# Altium PCB PCB1_avant_stackup.PcbDoc
Units mm, origin at the board's own origin, x right, y up, seen from the top; angles counter-clockwise.
Board outline 97.16 x 61.09 mm, 4 copper layers (Top Layer, GND, POWER, Bottom Layer), stack 0.603 mm thick; 63 components, 42 nets, 193 pads, 48 vias.
Unrouted connection lines stored in the file: 1.
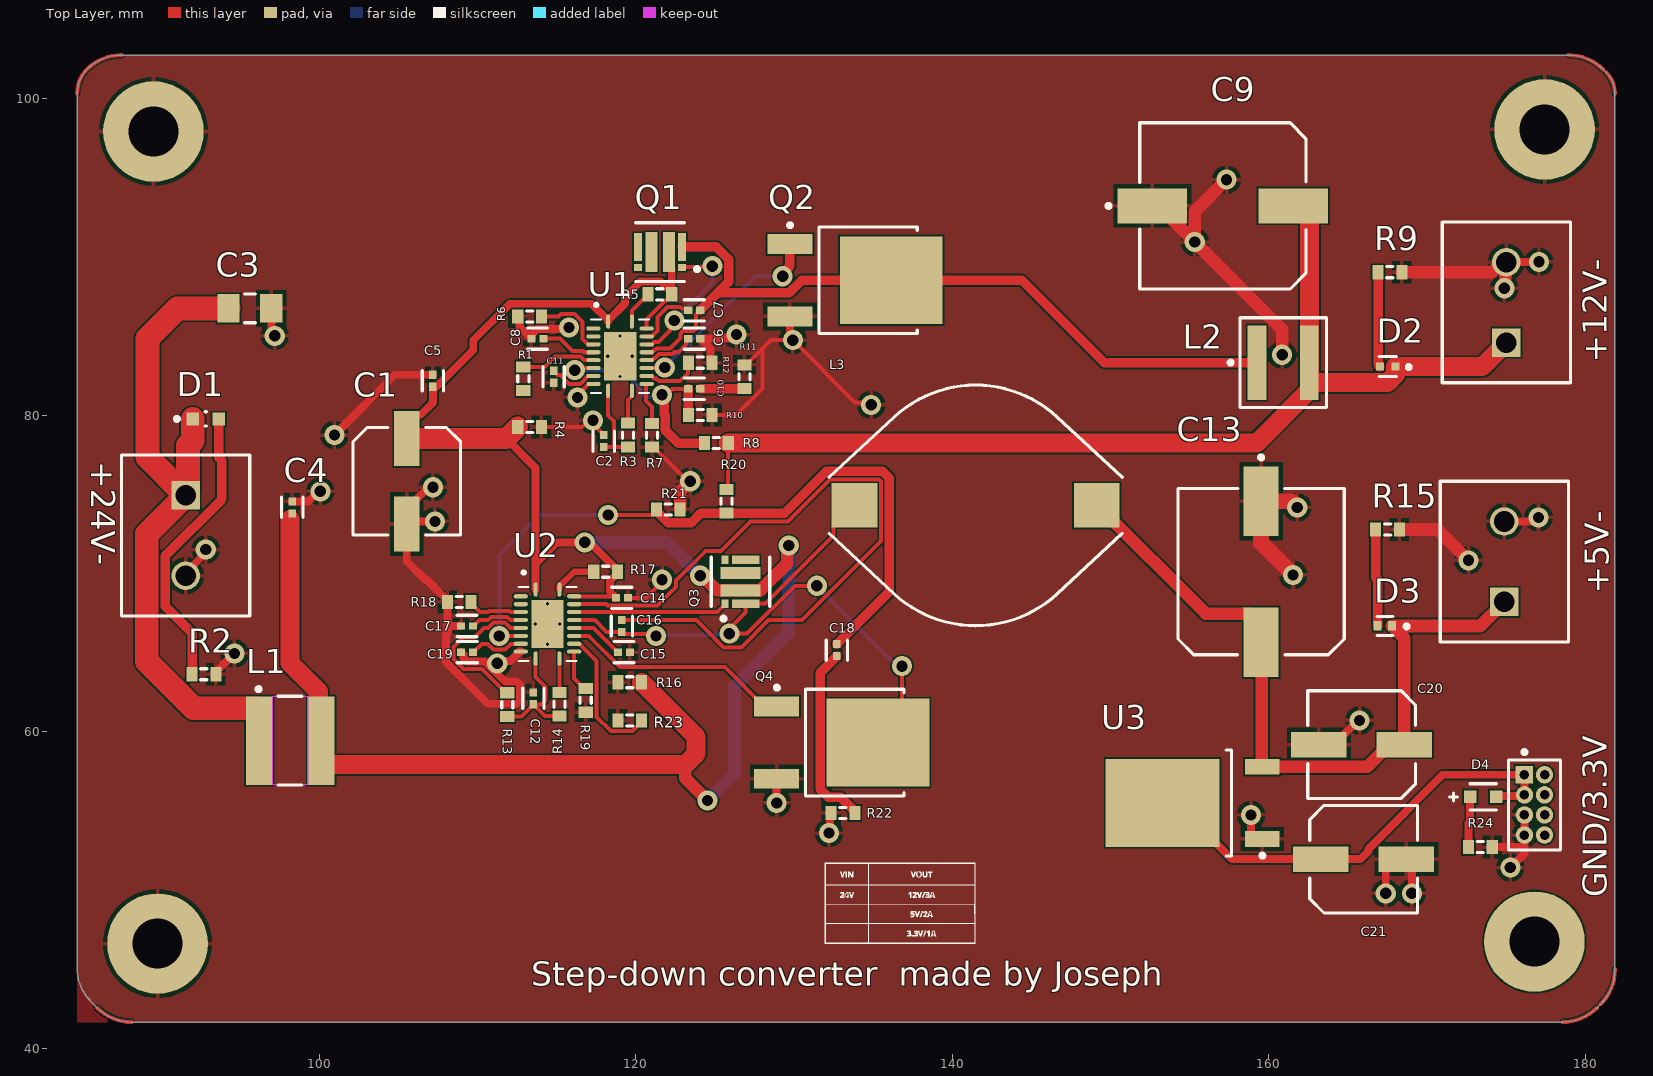
[diagram p0: Top Layer view]
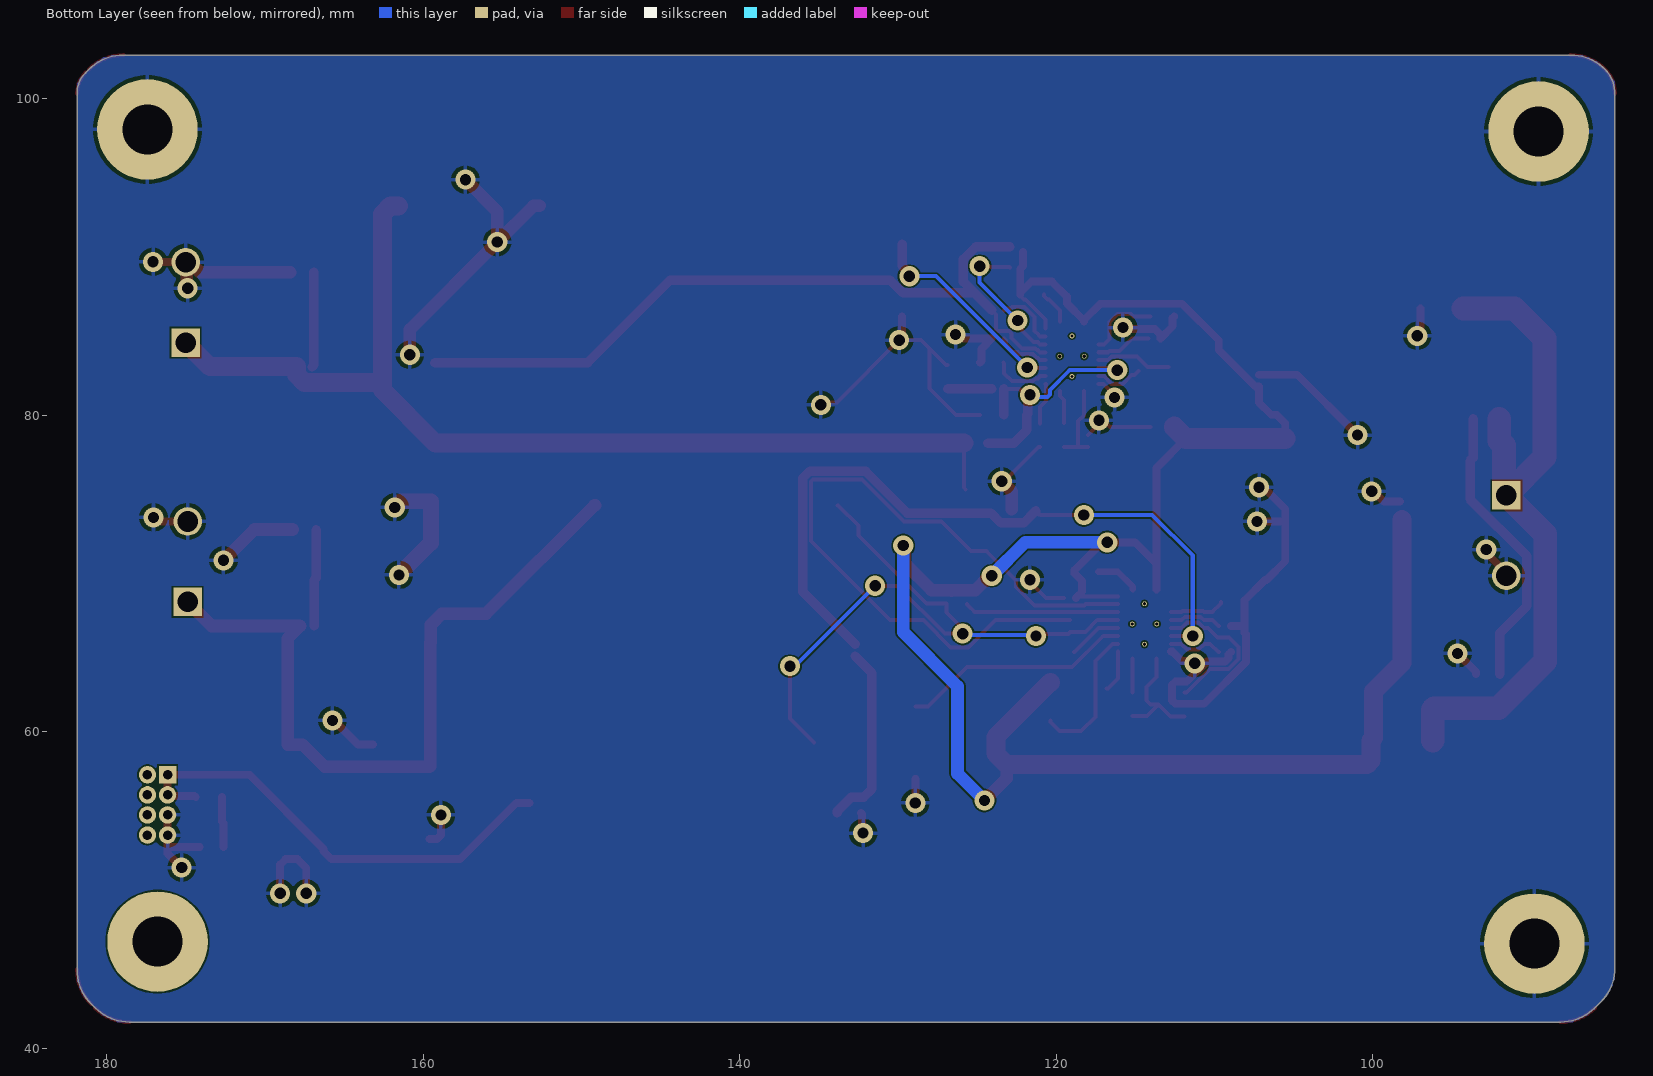
[diagram p1: Bottom Layer view, seen from below]
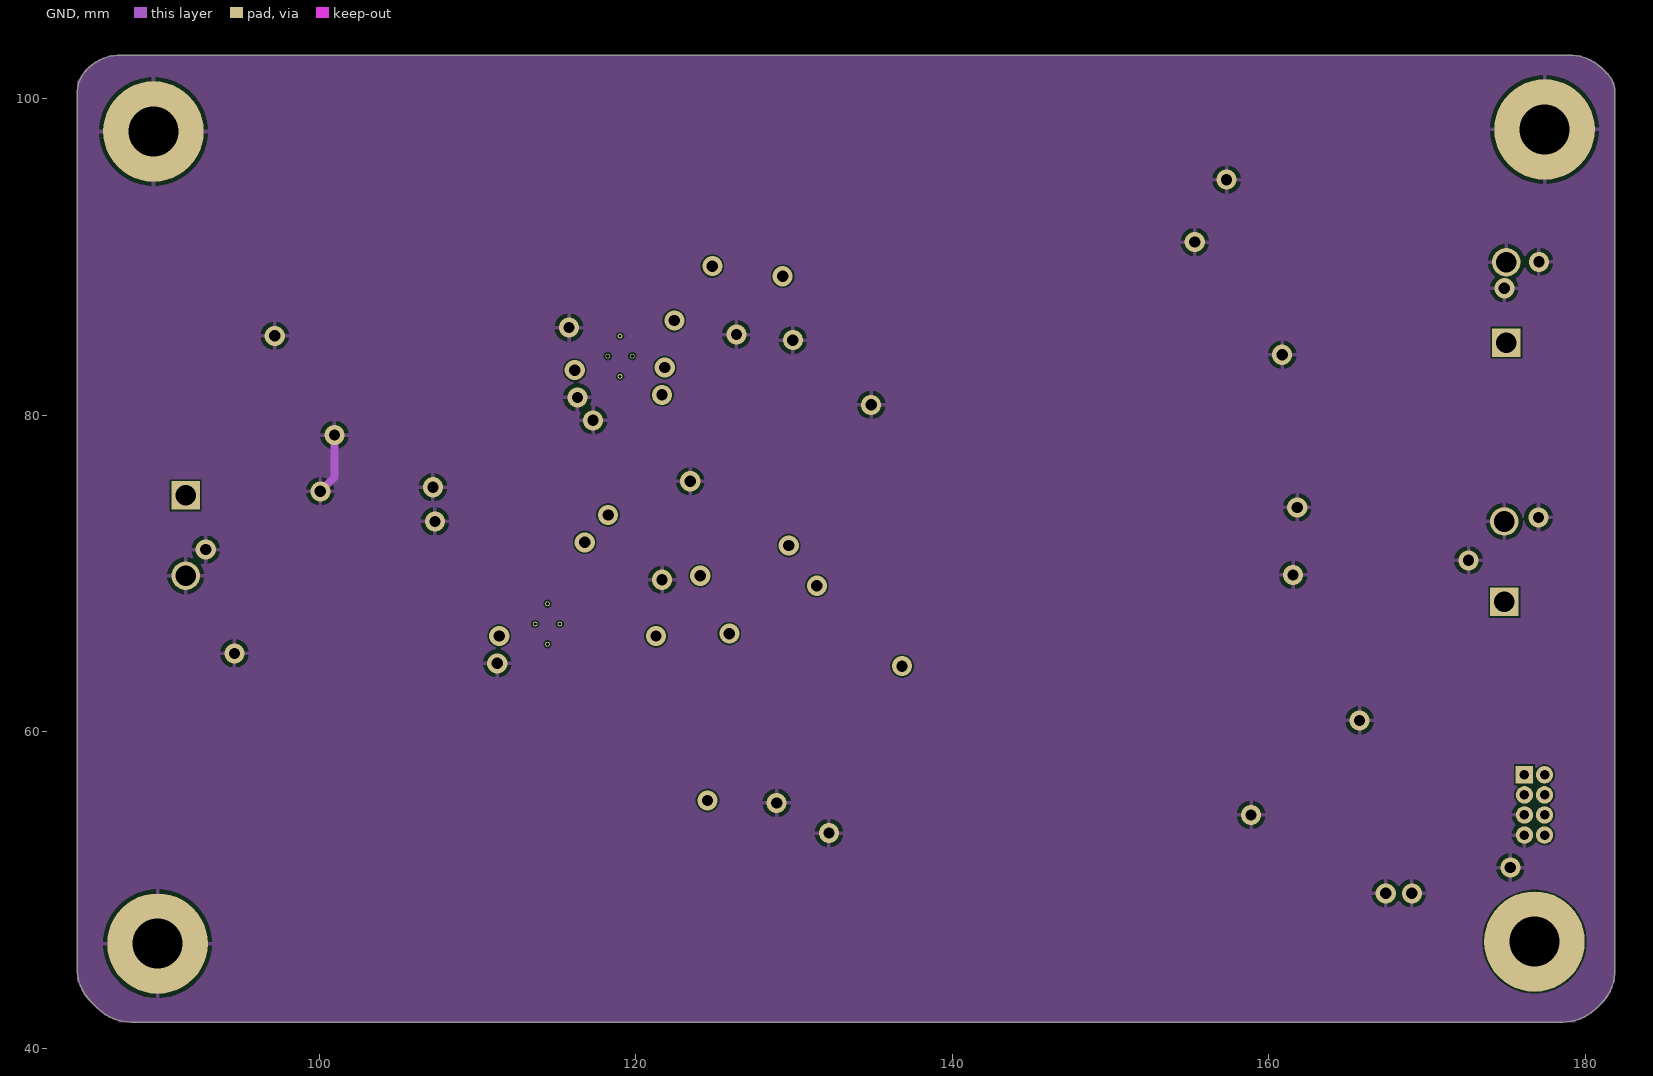
[diagram p2: GND]
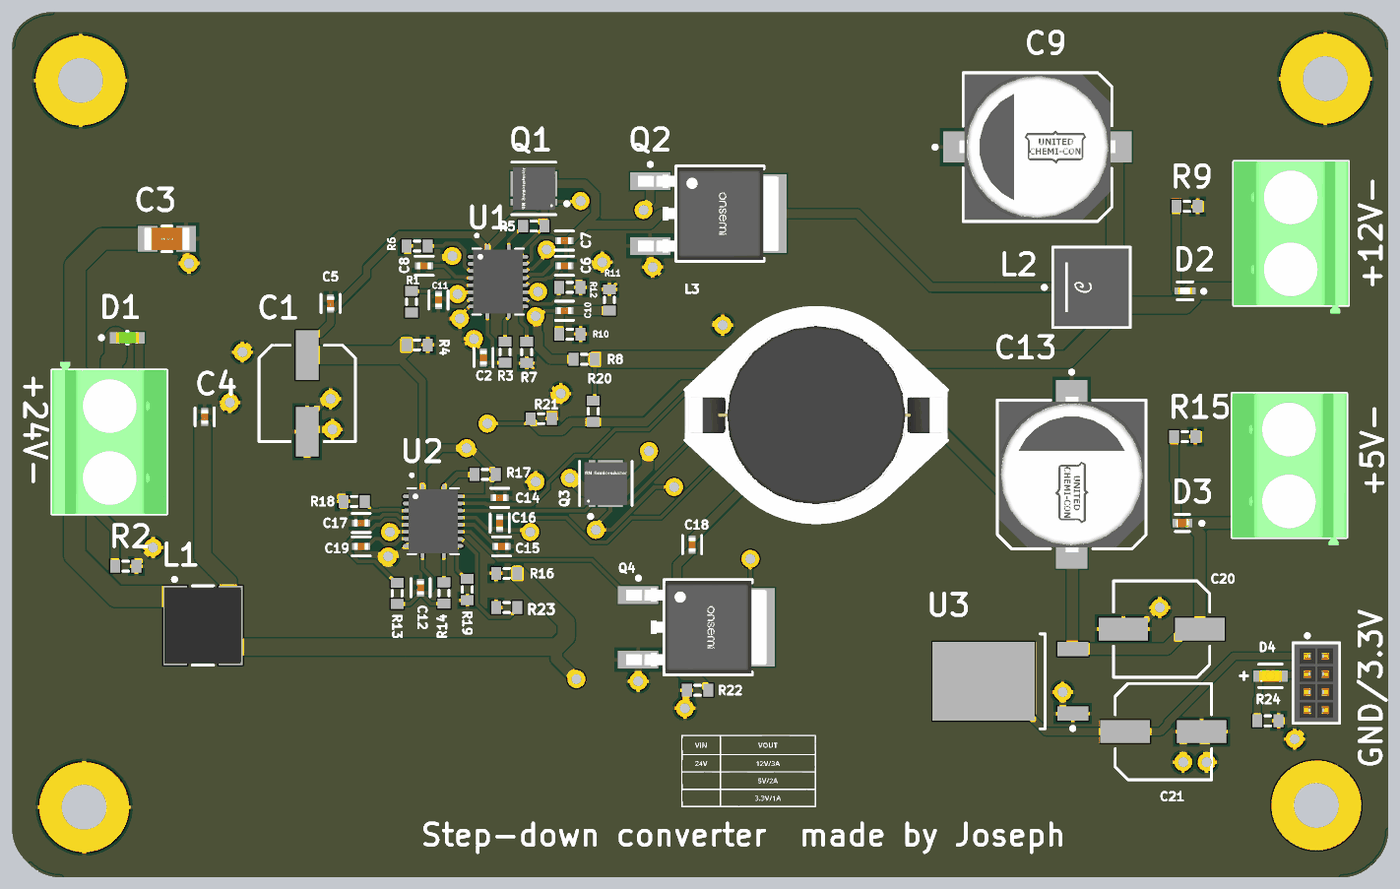
[diagram p3: 3D render of the assembled board from above, using the file's embedded part models]

## Layer stack, top to bottom
Top Solder: solder mask 0.0102, Solder Resist, Dk 3.5
Top Layer: signal copper 0.0356
Dielectric 2: prepreg 0.0711, PP-006, Dk 4.1
GND: signal copper 0.035
Dielectric 1: dielectric 0.32, FR-4, Dk 4.8
POWER: signal copper 0.035
Dielectric 3: prepreg 0.0711, PP-006, Dk 4.1
Bottom Layer: signal copper 0.0356
Bottom Solder: solder mask 0.0102, Solder Resist, Dk 3.5

## Board outline
85.607,42.917 85.97,42.554 ccw(c88.138,44.722) 88.138,41.656 178.562,41.656 ccw(c178.562,44.722) 180.73,42.554 180.966,42.79 ccw(c178.798,44.958) 181.864,44.958 181.864,100.33 ccw(c180.024,100.33) 181.325,101.631 181.111,101.845 ccw(c178.943,99.677) 178.943,102.743 87.503,102.743 ccw(c87.503,99.677) 85.335,101.845 ccw(c86.846,100.334) 84.709,100.334 84.709,45.085 ccw(c87.775,45.085)

## Design rules (kind name [scope] priority, off if disabled: settings)
Clearance [All] p1: gap=0.1 ignorepadtopadclearanceinfootprint=FALSE
PolygonConnect [All] p1: connectstyle=Relief reliefconductorwidth=0.254 reliefentries=4 polygonreliefangle="90 Angle" airgapwidth=0.254
RoutingVias [All] p1: holewidth=0.711 width=1.27 viastyle="Through Hole" minholewidth=0.711 minwidth=1.27 maxholewidth=0.711 maxwidth=1.27
SolderMaskExpansion [All] p1: expansion=0.102 istentingtop=FALSE
Width Width_4 [InNet('VIN')] p1: maxlimit=2 minlimit=0.254 preferedwidth=1.3
Width Width_3 [InNet('+24')] p2: maxlimit=2 minlimit=0.254 preferedwidth=1.3
Width Width_2 [InNet('+5')] p3: maxlimit=0.8 minlimit=0.254 preferedwidth=0.6
Width Width_1 [InNet('+12')] p4: maxlimit=1.2 minlimit=0.254 preferedwidth=1
Width [InNet('+3.3')] p5: maxlimit=0.5 minlimit=0.254 preferedwidth=0.3
30 further rules are at their usual default settings.

## Classes and differential pairs
component class Sheet1: +5V- +12V- +24V- C1 C2 C3 C4 C5 C6 C7 C8 C20 C21 D1 D2 D4 GND/3.3V L1 L2 Q1 Q3 Q4 R1 R2 R3 R4 R5 R6 R7 R8 R15 R18 R20 R24 U1 U3

## Components (designator, comment, footprint, x,y, rotation, side; value= is the part's Value field where it differs from the comment)
+5V- "12V" PHOE-1729128-2_V 174.879,70.739 r90 top (schematic designator J3)
+12V- "12V" PHOE-1729128-2_V 175.006,87.122 r90 top (schematic designator J2)
+24V- "1729128" PHOE-1729128-2_V 91.567,72.39 r270 top (schematic designator J1)
C1 "UUD1H100MCL1GS" NIC-CAPA2-6.3X5.8_V 105.537,75.819 r270 top
C2 "" FP-0402-L_1_0_0_05-W_0_5-IPC_C 117.983,78.357 r90 top
C3 "in1" FP-1206-L_3_2_0_2-W_1_6_0-IPC_B 95.631,86.741 r180 top
C4 "in2" FP-0402-L_1_0_0_05-W_0_5-IPC_C 98.298,74.168 r270 top
C5 "" FP-0402-L_1_0_0_05-W_0_5-IPC_C 107.188,82.171 r90 top
C6 "" FP-0402-L_1_0_0_05-W_0_5-IPC_C 123.698,84.836 r0 top
C7 "" FP-0402-L_1_0_0_05-W_0_5-IPC_C 123.696,86.614 r0 top
C8 "" FP-0402-L_1_0_0_05-W_0_5-IPC_C 113.794,84.836 r180 top
C9 "HHXC500ARA101MJA0G" FP-HXC-ALA0-MFG 157.094,93.218 r0 top
C10 "" FP-0402-L_1_0_0_05-W_0_5-IPC_C 123.7,81.661 r0 top
C11 "" FP-0402-L_1_0_0_05-W_0_5-IPC_C 114.808,82.421 r270 top
C12 "" FP-0402-L_1_0_0_05-W_0_5-IPC_C 113.538,62.105 r90 top
C13 "HHXC500ARA101MJA0G" FP-HXC-ALA0-MFG 159.512,70.104 r270 top
C14 "" FP-0402-L_1_0_0_05-W_0_5-IPC_C 119.126,68.453 r0 top
C15 "" FP-0402-L_1_0_0_05-W_0_5-IPC_C 119.255,65.024 r0 top
C16 "" FP-0402-L_1_0_0_05-W_0_5-IPC_C 119.126,66.675 r270 top
C17 "" FP-0402-L_1_0_0_05-W_0_5-IPC_C 109.347,66.675 r180 top
C18 "" FP-0402-L_1_0_0_05-W_0_5-IPC_C 132.715,65.149 r270 top
C19 "" FP-0402-L_1_0_0_05-W_0_5-IPC_C 109.349,65.024 r180 top
C20 "UUD1H100MCL1GS" NIC-CAPA2-6.3X5.8_V 165.862,59.182 r180 top
C21 "UUD1H100MCL1GS" NIC-CAPA2-6.3X5.8_V 165.989,51.943 r0 top
D1 "APT1608LZGCK" FP-APT1608LZGCK-MFG 92.837,79.756 r0 top
D2 "QBLP595-IB" FP-QBLP595-IB-MFG 167.513,83.058 r180 top
D3 "SML-P11VTT86R" FP-SML-P1-MFG 167.328,66.675 r180 top
D4 "APTD1608SYC/J3" FP-APTD1608SYC-J3-MFG 173.546,55.88 r180 top
GND/3.3V "LPPB042CFFN-RC" FP-LPPB042CFFN-RC-MFG 176.784,55.372 r270 top (schematic designator J4)
L1 "74438367047" WE-MAPI_5030 98.171,59.436 r0 top
L2 "XAL5050-223MEC" FP-XAL5050-223MEC-MFG 160.909,83.312 r0 top
L3 "74458122" "WE-PD4_Type X" 141.478,74.295 r0 top
Q1 "HS1" FP-511DG-MFG 121.539,90.297 r90 top
Q2 "LS1" FP-369AS-MFG 133.857,88.519 r270 top
Q3 "HS1" FP-511DG-MFG 126.619,69.469 r0 top
Q4 "LS1" FP-369AS-MFG 133.017,59.309 r270 top
R1 "Res3" J1-0603 112.903,82.296 r90 top value=1K
R2 "Res3" J1-0603 92.722,63.627 r180 top value=50K
R3 "Res3" J1-0603 119.507,78.74 r270 top value=1K
R4 "Res3" J1-0603 113.296,79.248 r180 top value=1K
R5 "Res3" J1-0603 121.527,87.63 r180 top value=1K
R6 "Res3" J1-0603 113.296,86.233 r0 top value=1K
R7 "Res3" J1-0603 121.031,78.728 r90 top value=1K
R8 "Res3" J1-0603 125.095,78.232 r0 top value=1K
R9 "Res3" J1-0603 167.652,89.027 r0 top value=590R
R10 "Res3" J1-0603 124.079,80.01 r180 top value=1K
R11 "Res3" J1-0603 126.873,82.423 r90 top value=1K
R12 "Res3" J1-0603 124.079,83.312 r0 top value=1K
R13 "Res3" J1-0603 111.887,61.71 r90 top value=1K
R14 "Res3" J1-0603 115.189,61.734 r270 top value=1K
R15 "Res3" J1-0603 167.501,72.771 r0 top value=5K
R16 "Res3" J1-0603 119.622,63.119 r0 top value=1K
R17 "Res3" J1-0603 118.098,70.104 r180 top value=1K
R18 "Res3" J1-0603 108.851,68.199 r0 top value=1K
R19 "Res3" J1-0603 116.84,61.976 r90 top value=1K
R20 "Res3" J1-0603 125.73,74.561 r90 top value=1K
R21 "Res3" J1-0603 122.059,74.041 r180 top value=1K
R22 "Res3" J1-0603 133.096,54.864 r180 top value=1K
R23 "Res3" J1-0603 119.622,60.706 r180 top value=1K
R24 "Res3" J1-0603 173.367,52.705 r0 top value=220R
U1 "TPS40170RGYT" QFN50P350X450X100-21N 119.011,83.719 r0 top
U2 "TPS40170RGYT" QFN50P350X450X100-21N 114.427,66.802 r0 top
U3 "LMS8117ADTX-3.3" TD03B_M 155.189,55.499 r180 top

## Footprints (in the part's own frame and the unit in brackets; to place one, negate y for a bottom-side part, rotate by r counter-clockwise, add the part's x,y. Pads: shape width x height; smd on the part's side, far side on the other; paste and mask are expansions set on the pad)
FP-369AS-MFG [mm]
  rect 1.25x2.85 smd paste+0 mask+0: 1(-2.286,-4.112) 3(2.286,-4.112)
  rect 5.55x6.5 smd paste+0 mask+0: 4(0,2.287)
  silkscreen extent -3.6,-4.22 3.36,3.93, body extent -3.46,-5.64 3.46,5.64, height 0.25
FP-0402-L_1_0_0_05-W_0_5-IPC_C [mm]
  rect 0.515x0.472 smd paste+0 mask+0: 1(-0.379,0) 2(0.379,0)
  silkscreen extent -0.64,-0.67 0.64,0.67, body extent -0.74,-0.38 0.74,0.38, height 0.25
FP-511DG-MFG [mm]
  rect 0.45x0.52 smd paste+0 mask+0: 1(-0.975,-1.39) 8(-0.975,1.39)
  rect 1.75x0.52 smd paste+0 mask+0: 2-3-4(0.325,-1.39) 5-6-7(0.325,1.39)
  rect 2.52x0.755 smd paste+0 mask+0: 9(0,0.553) 10(0,-0.553)
  silkscreen extent -1.85,-2.46 1.85,1.55, body extent -1.65,-1.75 1.65,1.75, height 0.25
FP-1206-L_3_2_0_2-W_1_6_0-IPC_B [mm]
  rect 1.404x1.806 smd paste+0 mask+0: 1(-1.351,0) 2(1.351,0)
  silkscreen extent -0.35,-0.9 0.35,0.9, body extent -2.3,-1.15 2.3,1.15, height 0.25
FP-APT1608LZGCK-MFG [mm]
  rect 0.8x0.8 smd paste+0 mask+0: 1(-0.825,0) 2(0.825,0)
  silkscreen extent -1.95,-0.45 0.05,0.45, body extent -1.33,-0.55 1.33,0.55, height 0.25
FP-APTD1608SYC-J3-MFG [mm]
  rect 0.8x0.8 smd paste+0 mask+0: 1(-0.825,0) 2(0.825,0)
  silkscreen extent -0.82,-0.82 2.13,0.82, body extent -1.33,-0.58 1.33,0.58, height 0.25
FP-HXC-ALA0-MFG [mm]
  rect 4.4x2.2 smd paste+0 mask+0: 1(-4.45,0) 2(4.45,0)
  silkscreen extent -7.35,-5.25 5.25,5.25, body extent -6.9,-5.5 6.9,5.5, height 0.25
FP-LPPB042CFFN-RC-MFG [mm]
  rect 1.1x1.1 hole 0.6 paste-1000 mask+0: 1(-1.905,-0.635)
  round 1.1 hole 0.6 paste-1000 mask+0: 2(-1.905,0.635) 3(-0.635,-0.635) 4(-0.635,0.635) 5(0.635,-0.635) 6(0.635,0.635) 7(1.905,-0.635) 8(1.905,0.635)
  silkscreen extent -3.46,-1.65 2.84,1.65, body extent -2.94,-1.75 2.94,1.75, height 0.25
FP-QBLP595-IB-MFG [mm]
  rect 0.5x0.5 smd paste+0 mask+0: 1(-0.5,0) 2(0.5,0)
  silkscreen extent -1.45,-0.63 0.55,0.62, body extent -0.85,-0.4 0.85,0.4, height 0.25
FP-SML-P1-MFG [mm]
  rect 0.5x0.6 smd paste+0 mask+0: 1(-0.45,0) 2(0.45,0)
  silkscreen extent -1.5,-0.6 0.5,0.6, body extent -0.8,-0.43 0.8,0.43, height 0.25
FP-XAL5050-223MEC-MFG [mm]
  rect 1.18x4.7 smd paste+0 mask+0: 1(-1.655,0) 2(1.655,0)
  silkscreen extent -3.45,-2.84 2.74,2.84, body extent -2.84,-2.94 2.84,2.94, height 0.25
J1-0603 [mm] "Chip Resistor, Body 1.6x0.8mm, IPC High Density"
  rect 0.7x0.9 smd: 1(-0.75,0) 2(0.75,0)
  silkscreen extent -0.2,-0.35 0.2,0.35, body extent -0.85,-0.48 0.85,0.48, height 0.9
NIC-CAPA2-6.3X5.8_V [mm] "Aluminum Electrolytic Capacitor, Diameter 6.3mm, Height 6.1mm, Pitch 5.4mm"
  rect 3.5x1.6 smd: 1(-2.7,0) 2(2.7,0)
  silkscreen extent -3.4,-3.4 3.4,3.4, body extent -3.14,-3.12 3.14,3.15, height 6.1
PHOE-1729128-2_V [mm] "Receptacle, 2-Leads, Body 8.1x10.16mm, Pitch 5.08mm"
  rect 1.8x1.8 hole 1.3: 1(-2.54,0)
  round 1.8 hole 1.3: 2(2.54,0)
  silkscreen extent -5.08,-4.05 5.08,4.05, body extent -5.65,-4.05 5.08,4.05, height 10.01
QFN50P350X450X100-21N [mm]
  oval 0.26x0.9 smd paste+0 mask+0.102: 1(-0.75,2.185) 10(-0.75,-2.185) 11(0.75,-2.185) 20(0.75,2.185)
  oval 0.9x0.26 smd paste+0 mask+0.102: 2(-1.685,1.75) 3(-1.685,1.25) 4(-1.685,0.75) 5(-1.685,0.25) 6(-1.685,-0.25) 7(-1.685,-0.75) 8(-1.685,-1.25) 9(-1.685,-1.75) 12(1.685,-1.75) 13(1.685,-1.25) 14(1.685,-0.75) 15(1.685,-0.25) 16(1.685,0.25) 17(1.685,0.75) 18(1.685,1.25) 19(1.685,1.75)
  rect 2.05x3.05 smd paste-3 mask+0.102: 21(0,0)
  round 0.3 hole 0.2 mask+0.102: V1(0,1.275) V2(0.775,0) V3(0,-1.275) V4(-0.775,0)
  silkscreen extent -1.83,-2.33 1.82,3.35, body extent -1.75,-2.25 1.75,2.25, height 1
TD03B_M [mm] "D-PAK, 4-Leads, Body 6.1x6.6mm, Pitch 2.29mm, Lead Span 9.7mm, IPC Low Density"
  rect 2.2x1 smd: 1(-4.4,2.28) 3(-4.4,-2.28)
  rect 7.2x5.55 smd: 4(1.9,0)
  silkscreen extent -4.52,-3.35 -2.1,3.45, body extent -2.45,-3.35 3.75,3.35, height 2.38
WE-MAPI_5030 [mm] "SMD Power Inductor, 2-leads, body 5.6x5.6mm"
  rect 1.7x5.6 smd: 1(-1.95,0) 2(1.95,0)
  Top Layer keep-out region: -1.1,2.8 1.1,2.8 1.1,-2.8 -1.1,-2.8
  silkscreen extent -2.12,-2.8 0.75,3.37, body extent -2.7,-2.7 2.7,2.7, height 3.1
"WE-PD4_Type X" [mm] "SMD Power Inductor, body 18.5x15.2mm"
  rect 2.9x2.8 smd: 1(-7.65,0) 2(7.65,0)
  silkscreen extent -9.27,-7.6 9.27,7.6, body extent -9.27,-7.62 9.27,7.62, height 7.15

## Part data
+5V- +12V-: library part CMP-2000-05815-1, "PCB Terminal Block, 13.5 A, 400 V, 2-Pin THD, RoHS, Bulk", Current Rating=13500mA, Manufacturer="Phoenix Contact", Package Description="2-Pin Through Hole Device, Body 8.1 x 10.16 mm, Pitch 5.08 mm", Package Reference=1729128-2, Package Version=03/2015, PartNumber=1729128, Voltage Rating=400V, Datasheet URL=https://datasheet.ciiva.com/16046/1729128-16046181.pdf, Datasheet Version=12/2013, Manufacturer URL=http://www.phoenixcontact.com/, Mounting Technology=ThroughHole, No. of Positions=2, No. of Rows=1, Orientation=Horizontal, Package URL=https://www.phoenixcontact.com/online/portal/pi/pxc/product_detail_page/!ut/p/b1/3VdJjqNKFDxLH8AFycySyWY2ozFsEPOMMQaDOX1XedGL_1Vdm5YXJleknhSKeBkvI6EA8ncAo3AYoDhBQGco6KN7VURTdemj9us_IEKEZo_YHiPAEWEFmDGOHMORkqKYCORBZxgL7ZoaZYcbFFUZ3fqxSY6GOuxydWUuHqz1ynmMFygu583Bob0Ewr6Sd_l-5m-kAueHiB0jpRwZwe58wwtkpxtMYd_LmGcDRU02dRNEyWt6Y2ti5pSyJ_reIkzIulrqApdnbT11V5jnCKbYNCvhEM1MCpPByat_X379-iThf08CI5GfOPqfBeS3BRoBOdD55AKVv0iLwCMq-2BrzXWSGRH7pUGD9uwXQjiph3xL0DKQwdGa0JImiIOmBNOestqgwTHSSs2oOep-78apyXQBvNi8ZLaFjvjWvcaUEBu0MC6Wbe-d6mB0FAebo2lUWinqYaZs5DAYzV0RP9yitUjnGJ0iI9xhZkT42OCQNUJJhkgWINNQLP2JFP6OpMg3JCVg70jqHT0lvKOnhHf0lPuOnnLf0VPuWx6_dxwUIvwk5WMkT0kLL1mh61l2yZVSzG3pYV_bqo-mj6uMKwKwdnnW8Jh5RTOJzMOA5c-eJDaZQw4mTMPH02PvS_ZAqNVjVTo2WyYLkwH_KU1mmmG5kjRhDqPXLwwVHvVOjCM60-fpXvTDfMGW1PVFVS1r4e4yVDk4ZdNbkUHvqPqQSeian4UD39fNKmachqdJ1NJbyk8rXT9mXTvPk3oE5meulKGgiruPJek-4I9hTT6G8ZLOyRSm2RRVbThERQad5OS28hdt4YW4vG0stgYYzsWsK4_7y6DZMjJSCqri1kyiZR5vD7pwIrNR7QwPHTcLTI5qT7eRlpHrdGiupYlqQDJ7zy_CND8fWWBoLRXxk1RVcXiBQwbTD4Xi7KL-FuO94t9xaqweXzH, Packing=Bulk, Pitch=5.08mm, RoHS=TRUE
+24V-: library part CMP-2000-05815-1, "PCB Terminal Block, 13.5 A, 400 V, 2-Pin THD, RoHS, Bulk", Current Rating=13500mA, Manufacturer="Phoenix Contact", Package Description="2-Pin Through Hole Device, Body 8.1 x 10.16 mm, Pitch 5.08 mm", Package Reference=1729128-2, Package Version=03/2015, Voltage Rating=400V, Datasheet URL=https://datasheet.ciiva.com/16046/1729128-16046181.pdf, Datasheet Version=12/2013, Manufacturer URL=http://www.phoenixcontact.com/, Mounting Technology=ThroughHole, No. of Positions=2, No. of Rows=1, Orientation=Horizontal, Package URL=https://www.phoenixcontact.com/online/portal/pi/pxc/product_detail_page/!ut/p/b1/3VdJjqNKFDxLH8AFycySyWY2ozFsEPOMMQaDOX1XedGL_1Vdm5YXJleknhSKeBkvI6EA8ncAo3AYoDhBQGco6KN7VURTdemj9us_IEKEZo_YHiPAEWEFmDGOHMORkqKYCORBZxgL7ZoaZYcbFFUZ3fqxSY6GOuxydWUuHqz1ynmMFygu583Bob0Ewr6Sd_l-5m-kAueHiB0jpRwZwe58wwtkpxtMYd_LmGcDRU02dRNEyWt6Y2ti5pSyJ_reIkzIulrqApdnbT11V5jnCKbYNCvhEM1MCpPByat_X379-iThf08CI5GfOPqfBeS3BRoBOdD55AKVv0iLwCMq-2BrzXWSGRH7pUGD9uwXQjiph3xL0DKQwdGa0JImiIOmBNOestqgwTHSSs2oOep-78apyXQBvNi8ZLaFjvjWvcaUEBu0MC6Wbe-d6mB0FAebo2lUWinqYaZs5DAYzV0RP9yitUjnGJ0iI9xhZkT42OCQNUJJhkgWINNQLP2JFP6OpMg3JCVg70jqHT0lvKOnhHf0lPuOnnLf0VPuWx6_dxwUIvwk5WMkT0kLL1mh61l2yZVSzG3pYV_bqo-mj6uMKwKwdnnW8Jh5RTOJzMOA5c-eJDaZQw4mTMPH02PvS_ZAqNVjVTo2WyYLkwH_KU1mmmG5kjRhDqPXLwwVHvVOjCM60-fpXvTDfMGW1PVFVS1r4e4yVDk4ZdNbkUHvqPqQSeian4UD39fNKmachqdJ1NJbyk8rXT9mXTvPk3oE5meulKGgiruPJek-4I9hTT6G8ZLOyRSm2RRVbThERQad5OS28hdt4YW4vG0stgYYzsWsK4_7y6DZMjJSCqri1kyiZR5vD7pwIrNR7QwPHTcLTI5qT7eRlpHrdGiupYlqQDJ7zy_CND8fWWBoLRXxk1RVcXiBQwbTD4Xi7KL-FuO94t9xaqweXzH, Packing=Bulk, PartNumber=1729128, Pitch=5.08mm, RoHS=TRUE
C1: library part CMP-0687-00043-1, "Aluminum Electrolytic Capacitor, UD Series, Low Impedance, 10 uF, 50 V, + / - 20%, -55 to 105 degC, Chip Type, 6.3 x 5.8 mm D x L, Pb-Free, Reel", Manufacturer=Nichicon, Rated Capacitance="10 uF", Rated Ripple Current (at 100kHz)="165 mA", Rated Voltage="50 V", Tolerance Rated Capacitance="-20 to 20%", ComponentLink1Description="Manufacturer URL", ComponentLink1URL=http://www.nichicon.co.jp/, ComponentLink2Description=Datasheet, ComponentLink2URL=http://products.nichicon.co.jp/en/pdf/XJA043/e-ud.pdf, ComponentLink3Description="Package Specification", ComponentLink3URL=http://products.nichicon.co.jp/en/pdf/XJA043/e-ud.pdf, DatasheetVersion=08/2012, Diameter="6.3 mm", Endurance Time="2000 h", Impedance="0.88 Ohm", Length="5.8 mm", Mounting Technology="Surface Mount", PackageDescription="2-Pin Surface Mount Device, Diameter 6.3 mm, Height 5.8 mm, Pitch 5.4 mm", PackageReference=CAPAE-D6.3H5.8, Packing="Dia382mm Reel", PartNumber=UUD1H100MCL1GS, RoHS=TRUE
C2 C5 C7 C8 C10 C11 C12 C14 C16 C17 C18 C19: library part CMP-14477-001974-2, "None", Capacitance=0.1uF, Case Code (Imperial)=0402, Case Code (Metric)=1005, Dielectric=X7R, Max Operating Temperature=125°C, Min Operating Temperature=-55°C, Package Quantity=10000, Tolerance=10%, Voltage=50V, Case/Package=0402, Construction=Flat, Depth=0.5mm, Halogen Free="Halogen Free", Height=0.5mm, Lead Free="Lead Free", Length=1mm, Mount="Surface Mount", Packaging="Tape and Reel", Radiation Hardening=No, RoHS Compliant=Yes, Series=M, Termination=SMD/SMT, Thickness=0.022inch, Voltage Rating=50V, Voltage Rating (DC)=50V, Width=0.02inch
C3: library part CMP-2000-07358-3, "None", Capacitance=4.7uF, Case Code (Imperial)=1206, Case Code (Metric)=3216, Dielectric=X7R, Max Operating Temperature=125°C, Min Operating Temperature=-55°C, Package Quantity=2000, Tolerance=10%, Voltage Rating=50V, Case/Package=1206, Construction=Flat, Depth=1.6mm, Height=1.6mm, Length=3.2mm, Mount="Surface Mount", Number of Pins=2, Packaging="Tape and Reel", Radiation Hardening=No, RoHS Compliant=Yes, Series=M, Termination=SMD/SMT, Thickness=0.071inch, Voltage Rating (DC)=50V, Width=1.6mm
C4: library part CMP-14477-001974-2, "None", Capacitance=6.8nF, Case Code (Imperial)=0402, Case Code (Metric)=1005, Dielectric=X7R, Max Operating Temperature=125°C, Min Operating Temperature=-55°C, Package Quantity=10000, Tolerance=10%, Voltage=50V, Case/Package=0402, Construction=Flat, Depth=0.5mm, Halogen Free="Halogen Free", Height=0.5mm, Lead Free="Lead Free", Length=1mm, Mount="Surface Mount", Packaging="Tape and Reel", Radiation Hardening=No, RoHS Compliant=Yes, Series=M, Termination=SMD/SMT, Thickness=0.022inch, Voltage Rating=50V, Voltage Rating (DC)=50V, Width=0.02inch
C6 C15: library part CMP-14477-001974-2, "None", Capacitance=4.7uF, Case Code (Imperial)=0402, Case Code (Metric)=1005, Dielectric=X7R, Max Operating Temperature=125°C, Min Operating Temperature=-55°C, Package Quantity=10000, Tolerance=10%, Voltage=50V, Case/Package=0402, Construction=Flat, Depth=0.5mm, Halogen Free="Halogen Free", Height=0.5mm, Lead Free="Lead Free", Length=1mm, Mount="Surface Mount", Packaging="Tape and Reel", Radiation Hardening=No, RoHS Compliant=Yes, Series=M, Termination=SMD/SMT, Thickness=0.022inch, Voltage Rating=50V, Voltage Rating (DC)=50V, Width=0.02inch
C9 C13: library part CMP-33769-000007-1, "CAP ALUM POLY 100UF 20% 50V SMD", Capacitance=100uF, Case/Package=Radial, ESR (Equivalent Series Resistance)=25mR, Max Operating Temperature=125°C, Min Operating Temperature=-55°C, Ratings=AEC-Q200, Resistor Type=Hybrid, Tolerance=20%, Voltage Rating=50V, Life (Hours)=4000Hour, Mount="Surface Mount", Packaging="Cut Tape", RoHS Compliant=Yes
C20: library part CMP-0687-00043-1, "Aluminum Electrolytic Capacitor, UD Series, Low Impedance, 10 uF, 50 V, + / - 20%, -55 to 105 degC, Chip Type, 6.3 x 5.8 mm D x L, Pb-Free, Reel", Manufacturer=Nichicon, Rated Capacitance="0.47 uF", Rated Ripple Current (at 100kHz)="165 mA", Rated Voltage="50 V", Tolerance Rated Capacitance="-20 to 20%", ComponentLink1Description="Manufacturer URL", ComponentLink1URL=http://www.nichicon.co.jp/, ComponentLink2Description=Datasheet, ComponentLink2URL=http://products.nichicon.co.jp/en/pdf/XJA043/e-ud.pdf, ComponentLink3Description="Package Specification", ComponentLink3URL=http://products.nichicon.co.jp/en/pdf/XJA043/e-ud.pdf, DatasheetVersion=08/2012, Diameter="6.3 mm", Endurance Time="2000 h", Impedance="0.88 Ohm", Length="5.8 mm", Mounting Technology="Surface Mount", PackageDescription="2-Pin Surface Mount Device, Diameter 6.3 mm, Height 5.8 mm, Pitch 5.4 mm", PackageReference=CAPAE-D6.3H5.8, Packing="Dia382mm Reel", PartNumber=UUD1H100MCL1GS, RoHS=TRUE
C21: library part CMP-0687-00043-1, "Aluminum Electrolytic Capacitor, UD Series, Low Impedance, 10 uF, 50 V, + / - 20%, -55 to 105 degC, Chip Type, 6.3 x 5.8 mm D x L, Pb-Free, Reel", Manufacturer=Nichicon, Rated Capacitance="33 uF", Rated Ripple Current (at 100kHz)="165 mA", Rated Voltage="50 V", Tolerance Rated Capacitance="-20 to 20%", ComponentLink1Description="Manufacturer URL", ComponentLink1URL=http://www.nichicon.co.jp/, ComponentLink2Description=Datasheet, ComponentLink2URL=http://products.nichicon.co.jp/en/pdf/XJA043/e-ud.pdf, ComponentLink3Description="Package Specification", ComponentLink3URL=http://products.nichicon.co.jp/en/pdf/XJA043/e-ud.pdf, DatasheetVersion=08/2012, Diameter="6.3 mm", Endurance Time="2000 h", Impedance="0.88 Ohm", Length="5.8 mm", Mounting Technology="Surface Mount", PackageDescription="2-Pin Surface Mount Device, Diameter 6.3 mm, Height 5.8 mm, Pitch 5.4 mm", PackageReference=CAPAE-D6.3H5.8, Packing="Dia382mm Reel", PartNumber=UUD1H100MCL1GS, RoHS=TRUE
D1: library part CMP-44529-000040-1, "LED GREEN CLEAR 2SMD", Case Code (Imperial)=0603, Case Code (Metric)=1608, Color=Green, Forward Voltage=2.65V, Lens Color=Colorless, Test Current=2mA, Case/Package=0603, Dominant Wavelength=525nm, Height=0.75mm, Length=1.6mm, Lens Transparency=Clear, Luminous Intensity=50mcd, Mount="Surface Mount", Packaging="Cut Tape", Viewing Angle=120°, Width=0.8mm
D2: library part CMP-113271-000002-1, "LED BLUE CLEAR 0402 SMD", Case Code (Imperial)=0402, Case Code (Metric)=1005, Color=Blue, Forward Voltage=3.1V, Lens Color=Colorless, Test Current=20mA, Case/Package=0402, Dominant Wavelength=465nm, Height=0.6mm, Length=1mm, Lens Size=0.5mm, Lens Style=Flat, Lens Transparency=Clear, Luminous Intensity=85mcd, Mount="Surface Mount", Packaging="Tape and Reel", Viewing Angle=140°, Width=0.5mm
D3: library part CMP-08952-000003-1, "LED RED CLEAR 1006 SMD", Colour=Red, Forward Current=1mA, Forward Voltage=1.8V, Manufacturer=Rohm, Package=SML-P1, Power Dissipation=50mW, Reverse Voltage=5V, Temperature="-40°C to +85°C", Temperature Range High=+85°C, Temperature Range Low=-40°C, Automotive=No, Category=Diode, ComponentLink2Description=Datasheet, ComponentLink2URL=https://www.rohm.com/datasheet/SML-P11VT(R)/sml-p11-e, Device Class L1=Optoelectronics, Device Class L2=LEDs, Device Class L3=unset, Digikey Description="LED RED CLEAR 1006 SMD", Height=0.25mm, Lead Free=Yes, Led Orientation="Top View", Luminous Intensity=4mcd, Manufacturer Part Number=SML-P11VTT86R, Mouser Description="SML-P11 Series Red 0402 Clear 4 mcd 1.8 V Surface Mount PICOLED? LED", Octopart=https://octopart.com/sml-p11vtt86r-rohm-34112314, RoHS=TRUE, Wavelength=626nm
D4: library part CMP-44529-000016-1, "LED YELLOW CLEAR CHIP SMD", Case Code (Imperial)=0603, Case Code (Metric)=1608, Color=Yellow, Forward Current=20mA, Forward Voltage=2V, Lens Color=Colorless, Max Operating Temperature=85°C, Min Operating Temperature=-40°C, Package Quantity=2000, Case/Package=0603, Dominant Wavelength=590nm, Height=0.95mm, Illumination Color=Yellow, Lead Free="Lead Free", Length=1.6mm, Lens Style=Clear, Lens Transparency=Clear, Luminous Intensity=900mcd, Mount="Surface Mount", Packaging="Tape and Reel", Test Current=20mA, Viewing Angle=60°, Width=0.8mm
GND/3.3V: library part CMP-25680-000056-1, "CONN HDR 8POS 0.05 GOLD PCB", Package Quantity=1, Connector Type=Header, Contact Plating=Gold, Contact Type="Female Socket", Lead Free="Lead Free", Mount="Through Hole", Number of Positions=8, Number of Rows=2, Packaging=Bulk, Pitch=0.05inch, Row Spacing=0.05inch, Termination=Solder
L1: library part CMP-03913-107500293-2, "74438367047 Inductor, 4.7Uh, Shielded, 5.5A Rohs Compliant: Yes", Ambient Temperature Range High=85°C, Ambient Temperature Range Low=-40°C, Current Rating=5.5A, DC Resistance (DCR)=30mΩ, Inductance=4.7µH, Max Operating Temperature=125°C, Height=3.1mm, Length=5.4mm, Min Operating Temperature=-40°C, NexarPartId=107500293, RoHS=Compliant, Width=5.4mm
L2: library part CMP-11268-000132-1, "Fixed Inductors 22uH Shld 20% 3.4A 99.65mOhms AECQ2", Case/Package=SMD/SMT, DC Resistance (DCR)=99.65mR, Inductance=22uH, Inductance Tolerance=20%, Max DC Current=3.4A, Max Operating Temperature=125°C, Min Operating Temperature=-40°C, Package Quantity=250, Saturation Current=3.6A, Self Resonant Frequency=11MHz, Test Frequency=100kHz, Core Material=Composite, Height=5.1mm, Lead Free="Contains Lead", Length=5.68mm, Mount="Surface Mount", Packaging="Tape and Reel", REACH SVHC="No SVHC", RMS Current (Irms)=3.4A, RoHS Compliant=Yes, Series=XAL5050, Shielding=Shielded, Termination=SMD/SMT, Tolerance=20%, Width=5.48mm
L3: library part CMP-0227-00683-2, Ambient Temperature Range High=85°C, Ambient Temperature Range Low=-40°C, Case/Package=Nonstandard, Current Rating=3.5A, DC Resistance (DCR)=43mΩ, Inductance=22µH, Inductance Tolerance=20%, Max Operating Temperature=125°C, Saturation Current=7A, Self Resonant Frequency=13MHz, Test Frequency=100kHz, Composition=Wirewound, Core Material=Ferrite, Height=7.11mm, Height - Seated (Max)=7.112mm, Length=18.54mm, Min Operating Temperature=-40°C, Mount="Surface Mount", NexarPartId=8917327, Number of Pins=2, Packaging="Cut Tape (CT)", REACH SVHC=Unknown, Resistance=43mΩ, RMS Current (Irms)=3.5A, RoHS=Compliant, Shielding=Unshielded, Tolerance=20%, Width=15.24mm
Q1 Q3: library part CMP-00278-84602795-1, "FDMC9430L-F085 Dual N-Channel Logic Level PowerTrench® MOSFET 40V, 12A, 8.2mΩ", Continuous Drain Current (ID)=12A, Drain to Source Breakdown Voltage=40V, Drain to Source Resistance=6.3mΩ, Gate to Source Voltage (Vgs)=12V, Manufacturer Lifecycle Status=ACTIVE, Max Junction Temperature (Tj)=150°C, Min Operating Temperature=-55°C, Power Dissipation=11.4W, Drain to Source Voltage (Vdss)=40V, Element Configuration=Dual, Height=800µm, Lifecycle Status=Production, Max Operating Temperature=150°C, Mount="Surface Mount", NexarPartId=84602795, Number of Channels=2, RoHS=Compliant, Schedule B=8541290080, Turn-Off Delay Time=17ns, Turn-On Delay Time=7ns, Weight=196mg
Q2 Q4: library part CMP-00278-84602781-1, "FDD86581-F085 PowerTrench® MOSFET, N-Channel, 60 V, 25 A, 15 mΩ", Continuous Drain Current (ID)=25A, Drain to Source Breakdown Voltage=60V, Drain to Source Resistance=12.3mΩ, Gate to Source Voltage (Vgs)=20V, Manufacturer Lifecycle Status="LAST SHIPMENTS", Max Junction Temperature (Tj)=175°C, Min Operating Temperature=-55°C, Power Dissipation=48.4W, Drain to Source Voltage (Vdss)=60V, Element Configuration=Single, Height=2.517mm, Lifecycle Status=EOL, Max Operating Temperature=175°C, Mount="Surface Mount", NexarPartId=84602781, Number of Channels=1, RoHS=Compliant, Schedule B="8541290080, 8541290080", Turn-Off Delay Time=14.6ns, Turn-On Delay Time=7.5ns, Weight=260.37mg
R1 R2 R3 R4 R5 R6 R7 R8 R9 R10 R11 R12 R13 R14 R15 R16 R17 R18 R19 R20 R21 R22 R23 R24: "Resistor", LatestRevisionDate=29-May-2009, LatestRevisionNote="IPC-7351 Footprint Added.", PackageDescription="Chip Resistor", PackageReference=J1-0603, Published=8-Jun-2000, Publisher="Altium Limited"
U1 U2: "4.5 V to 60 V Wide-Input Synchronous PWM Buck Controller", Package="VQFN-20 Texas Instruments", Check_prices=https://www.snapeda.com/parts/TPS40170RGYT/Texas+Instruments/view-part/?ref=eda, MF="Texas Instruments", MP=TPS40170RGYT, SnapEDA_Link=https://www.snapeda.com/parts/TPS40170RGYT/Texas+Instruments/view-part/?ref=snap
U3: library part CMP-0062-00182-2, "1A Low-Dropout Linear Regulator, 3-pin TO-252", Manufacturer="National Semiconductor", PackageTopMarking=NSUZXYTT*LMS8117*ADT-3.3, PowerWise=N, Code_JEDEC=TO-252-AA, ComponentLink1Description="LMS8117A Datasheet", ComponentLink1URL=http://www.national.com/ds/LM/LMS8117A.pdf, ComponentLink2Description="LMS8117A Web Page", ComponentLink2URL=http://www.national.com/pf/LM/LMS8117A.html, ComponentLink3Description="TD03B Package Page", ComponentLink3URL=http://www.national.com/packaging/folders/td03b.html, CompType="LDO IC", DatasheetVersion=Apr-2005, PackageDescription="TO252, Molded, Jedec, 6.8 x 6.10 x 2.30mm Body, 3 Lead, 2.28mm Pitch, Surface Mount", PackageReference=TD03B, PackageVersion="revD, Feb-2009", PinCount=3, RevisionNote="Component URLs added", RoHS=N

## Free pads (board coordinates)
  round 6.35 hole 3.175: 1(89.535,97.917) 1(89.789,46.609) 1(176.784,46.736) 1(177.419,98.044)

## Via types
v1: diameter 1.27, hole 0.711, Top Layer to Bottom Layer, 48 vias

## Nets (pads, with @x,y where several pads share a name; then routed paths per layer and width w, separated by ;. In a path a pad name is that pad's centre, name@x,y a point inside that pad or via, vN(x,y) a via of type N, cw(c..) or ccw(c..) an arc to the next point about the centre after c; other vN are vias at no path point)
+3.3: C21.1 D4.1 GND/3.3V.1 GND/3.3V.3 U3.4 | length 29.7
  Top Layer w0.5: U3.4 154.114,55.499 157.67,51.943 C21.1 165.789,51.943 166.292,52.446 166.292,52.59 170.978,57.277 GND/3.3V.1 GND/3.3V.3 176.085,55.944 174.434,55.944 D4.1
+5: +5V-.1 C13.2 C20.1 D3.1 L3.2 U3.3 | length 47.6
  Top Layer w0.8: L3.2 149.178,74.295 156.019,67.454 158.812,67.454 159.512,66.754 C13.2 159.551,65.616 159.551,57.818 U3.3 166.209,57.779 167.612,59.182 C20.1 168.562,65.891 D3.1 173.355,66.675 +5V-.1
+12: +12V-.1 C9.2 D2.1 L2.2 R8.2 R20.2 | length 67.2
  Top Layer w0.254: R20.2 125.845,75.426 R8.2
  Top Layer w1.2: R8.2 159.224,78.232 162.564,81.572 L2.2@162.564,82.068 ; C9.2 162.064,93.218 162.564,92.718 L2.2 L2.2@162.564,82.068 ; +12V-.1 173.482,83.058 D2.1 168.013,82.568 167.503,82.058 162.574,82.058 L2.2@162.564,82.068
+24: +24V-.1 C3.2 D1.1 L1.1 | length 43.7
  Top Layer w1.5: D1.1 92.012,78.375 91.717,78.08 91.717,75.08 +24V-.1 ; C3.2 91.059,86.741 89.154,84.836 89.154,77.343 +24V-.1 ; L1.1 96.221,61.386 96.121,61.486 92.057,61.486 89.117,64.426 89.117,72.48 +24V-.1
GND: +5V-.2 +12V-.2 +24V-.2 C1.2 C2.2 C3.1 C4.1 C5.2 C6.2 C8.2 C9.1 C11.2 C12.2 C13.1 C14.2 C15.2 C17.2 C19.2 C20.2 C21.2 GND/3.3V.5 GND/3.3V.7 pad.1@89.535,97.917 pad.1@89.789,46.609 pad.1@177.419,98.044 Q2.3 Q4.3 R2.1 R4.1 R6.1 R7.1 R9.2 R10.1 R11.2 R12.2 R15.2 R16.1 R18.1 R19.1 R21.1 R22.2 R23.2 R24.2 U1.9 U2.9 U3.1 | length 152.8
  Top Layer w0.254: R4.1 116.616,79.248 v1@117.035,79.667 ; v1(116.319,81.114) 116.319,81.28 117.008,81.969 U1.9 ; v1(117.31,79.667) 117.31,79.43 117.983,78.757 C2.2 ; C14.2 120.65,68.453 121.666,69.469 v1(121.666,69.596) ; R7.1 121.131,77.978 123.29,75.819 v1(123.444,75.819) ; R10.1 126.331,80.01 128.008,81.687 128.008,84.209 ; R11.2 126.973,83.173 128.008,84.209 ; v1(134.874,80.645) 134.714,80.805 133.858,80.805 v1(129.927,84.736) 128.536,84.736 128.008,84.209
  Top Layer w0.5: +24V-.2 91.567,70.04 92.837,71.31 v1(92.837,71.501) ; R2.1 93.472,63.761 v1(94.651,64.94) ; C3.1 96.982,85.222 v1(97.195,85.009) ; C4.1 99.312,74.547 99.949,75.184 v1(100.076,75.184) ; v1(100.965,78.74) 104.775,82.55 C5.2 ; v1(107.188,75.438) 107.041,75.291 106.759,75.291 105.537,74.069 C1.2 ; v1(107.315,73.279) 105.697,73.279 C1.2 ; C17.2 108.101,66.675 ; C19.2 108.971,65.018 109.12,64.868 109.12,64.643 109.325,64.438 110.484,64.438 111.762,63.16 112.482,63.16 112.687,62.955 112.687,61.965 112.482,61.76 110.654,61.76 108.009,64.405 108.009,66.156 108.101,66.248 108.101,66.675 ; v1(111.252,64.316) 111.399,64.463 112.073,64.463 112.662,65.052 U2.9 ; R6.1 112.646,86.133 112.646,85.612 113.416,84.842 C8.2 113.424,84.844 113.424,85.075 113.781,85.433 115.69,85.433 v1(115.787,85.53) ; R12.2 124.729,83.412 124.729,84.177 124.077,84.83 C6.2 125.903,84.836 126.157,85.09 v1(126.365,85.09) ; v1(128.905,55.499) Q4.3 ; Q2.3 129.744,84.919 v1(129.927,84.736) ; v1(132.207,53.594) 132.276,53.663 132.276,54.795 R22.2 ; v1(158.877,54.737) 158.877,53.469 159.127,53.219 U3.1 ; C20.2 164.112,59.182 165.636,60.706 v1(165.735,60.706) ; v1(167.386,49.784) 167.386,51.393 167.936,51.943 C21.2 169.037,51.595 v1(169.037,49.784) ; R24.2 176.149,52.705 ; +5V-.2 176.576,73.279 176.83,73.533 v1(177.038,73.533) ; +12V-.2 177.048,89.662 v1(177.066,89.68) ; v1(175.256,51.415) 176.149,52.308 176.149,52.705 ; GND/3.3V.5 GND/3.3V.7 176.149,52.705 ; C1.2 105.537,70.763 106.719,69.581 106.819,69.581 108.101,68.299 R18.1 108.101,66.675
  Top Layer w0.8: R21.1 122.809,75.184 v1(123.444,75.819) ; C9.1 153.035,93.218 v1(155.321,90.932) ; v1(157.329,94.873) 155.321,92.865 v1(155.321,90.932) ; v1(160.842,83.81) 160.842,85.411 v1(155.321,90.932) ; R15.2 170.668,72.771 v1(172.616,70.823) ; R9.2 174.1,89.027 174.735,89.662 +12V-.2 174.942,89.599 174.942,88.075 v1(174.879,88.011)
  Top Layer w1: v1(161.534,69.902) 159.512,71.925 C13.1 161.412,74.554 v1(161.798,74.168)
  GND w0.5: v1(100.076,75.184) 100.965,76.073 v1(100.965,78.74)
NetC2_1: C2.1 R1.1 R3.2 U1.10 | length 5.3
  Top Layer w0.254: C2.1 117.989,77.984 118.745,77.984 ; U1.10 118.261,79.986 118.618,79.629 118.618,78.111 118.745,77.984 ; R3.2 119.501,77.984 118.745,77.984
NetC6_1: C6.1 U1.15 | length 3.3
  Top Layer w0.254: U1.15 121.018,83.469 121.161,83.612 121.223,83.612 121.477,83.866 122.328,83.866 122.432,83.97 122.705,83.97 123.189,84.454 123.189,84.727 123.298,84.836 C6.1
NetC7_1: C7.1 U1.18 | length 4
  Top Layer w0.254: U1.18 121.018,84.969 121.161,85.112 121.164,85.112 121.373,85.321 121.373,86.194 122.022,86.843 122.798,86.843 122.917,86.723 123.208,86.723 C7.1
NetC7_2: C7.2 L2.1 Q1.2-3-4 Q2.4 U1.16 | length 50.5
  Top Layer w0.254: U1.16 121.018,83.969 121.161,84.112 121.222,84.112 121.33,84.22 122.181,84.22 122.835,84.873 122.835,85.166 122.968,85.299 123.653,85.299 123.802,85.448 123.802,86.363 C7.2@124.053,86.614
  Top Layer w0.6: Q1.2-3-4 125.091,90.622 125.876,89.837 125.876,88.437 C7.2@124.063,86.625 ; C7.2 125.197,87.737 129.714,87.737 130.496,88.519 Q2.4 144.399,88.519 149.606,83.312 L2.1
NetC8_1: C8.1 U1.5 | length 3.5
  Top Layer w0.254: C8.1 115.221,84.836 116.002,84.054 116.655,84.054 116.739,83.97 U1.5 U1.5
NetC10_1: C10.1 R8.1 R10.2 U1.7 | length 15.8
  Top Layer w0.254: v1(116.151,82.838) 116.281,82.968 U1.7 U1.7 ; v1@121.941,81.28 122.322,81.661 C10.1
  Top Layer w0.6: v1@121.794,81.152 121.794,80.081 121.881,79.994 121.881,79.033 122.682,78.232 R8.1 ; C10.1 123.329,81.654 R10.2
  Bottom Layer w0.254: v1(116.151,82.838) 119.15,82.838 120.396,81.592 120.396,81.302 120.545,81.153 121.539,81.153 v1(121.666,81.28)
NetC10_2: C10.2 R11.1 | length 2.8
  Top Layer w0.6: C10.2 124.091,81.673 R11.1
NetC11_1: C11.1 U1.8 | length 3.1
  Top Layer w0.254: C11.1 114.808,82.778 115.059,82.527 115.244,82.527 115.794,81.976 116.508,81.976 117,82.468 U1.8 U1.8
NetC12_1: C12.1 R13.1 R14.2 U2.10 | length 7.7
  Top Layer w0.254: R13.1 112.793,60.96 C12.1@113.538,61.705 ; U2.10 113.677,63.447 114.3,62.824 114.3,61.976 114.051,61.727 C12.1 C12.1@113.538,61.705 ; R14.2 114.259,60.984 C12.1@113.538,61.705
NetC15_1: C15.1 U2.15 | length 3.4
  Top Layer w0.254: U2.15 117.327,66.552 118.855,65.024 C15.1
NetC16_1: C16.1 U2.18 | length 46.6
  Top Layer w0.254: U2.18 118.149,68.052 118.225,67.976 121.392,67.976 122.557,69.141 122.557,69.547 124.425,71.416 125.394,71.416 127.263,73.284 129.634,73.284 132.272,75.922 135.372,75.922 135.505,75.789 135.505,72.056 130.503,67.054 128.395,67.054 126.671,65.33 125.557,65.33 124.303,66.584 123.833,67.054 C16.1
NetC16_2: C16.2 L3.1 Q3.2-3-4 Q4.4 U2.16 | length 42.2
  Top Layer w0.254: U2.16 117.413,67.052 118.169,66.296 C16.2 119.126,66.277 119.235,66.168 121.157,66.168 v1(121.285,66.04) ; v1(131.445,69.215) 130.055,69.215 127.032,66.192 v1(125.914,66.192) 125.914,66.509 126.944,67.539 Q3.2-3-4 126.953,68.088 128.2,68.088 132.505,72.393 132.505,73.022 133.778,74.295 L3.1 ; Q4.4 136.828,60.832 v1(136.828,64.139)
  Bottom Layer w0.254: v1(121.285,66.04) 121.361,66.116 125.839,66.116 v1(125.914,66.192) ; v1(131.445,69.215) 136.521,64.139 v1(136.828,64.139)
NetC17_1: C17.1 U2.5 | length 3.3
  Top Layer w0.254: C17.1 109.747,66.675 110.124,67.052 110.671,67.052 110.875,67.256 111.883,67.256 112.087,67.052 U2.5
NetC18_1: C18.1 R20.1 R21.2 U2.7 | length 46.1
  Top Layer w0.254: v1(111.379,66.04) 111.391,66.052 U2.7 ; v1(118.258,73.695) 120.963,73.695 120.986,73.718 121.086,73.718 121.309,73.941 R21.2
  Top Layer w0.6: R21.2@121.309,73.941 122.059,73.191 123.51,73.191 124.129,73.811 R20.1 129.416,73.811 132.054,76.449 135.59,76.449 136.032,76.007 136.032,68.844 C18.1
  Bottom Layer w0.254: v1(111.379,66.04) 111.379,71.12 113.954,73.695 v1(118.258,73.695)
NetC18_2: C18.2 R22.1 | length 11.7
  Top Layer w0.6: C18.2 131.655,63.71 131.655,56.368 132.161,55.863 132.947,55.863 133.846,54.964 R22.1
NetC19_1: C19.1 U2.8 | length 3.5
  Top Layer w0.254: C19.1 109.749,65.024 110.277,65.552 110.648,65.552 111.022,65.178 111.736,65.178 112.11,65.552 U2.8
NetD1_2: D1.2 R2.2 | length 18.4
  Top Layer w0.6: R2.2 91.972,66.23 90.267,67.935 90.267,71.09 93.853,74.676 93.853,77.12 93.662,77.312 D1.2
NetD2_2: D2.2 R9.1 | length 6
  Top Layer w0.6: R9.1 166.902,83.169 D2.2
NetD3_2: D3.2 R15.1 | length 6.1
  Top Layer w0.6: R15.1 166.751,69.737 166.878,69.61 D3.2
NetD4_2: D4.2 R24.1 | length 3.2
  Top Layer w0.5: R24.1 172.617,54.215 172.721,54.32 D4.2
NetQ1_1: Q1.1 U1.17 | length 9
  Top Layer w0.254: U1.17 121.018,84.469 121.161,84.612 121.442,84.612 122.174,85.344 122.174,85.44 122.44,85.706 v1(122.44,85.981) ; Q1.1 122.972,89.365 124.798,89.365 v1(124.841,89.408)
  Bottom Layer w0.254: v1(122.44,85.981) 124.841,88.382 v1(124.841,89.408)
NetQ2_1: Q2.1 U1.14 | length 13.2
  Top Layer w0.254: U1.14 120.697,82.97 121.8,82.97 v1(121.834,83.004)
  Top Layer w0.6: v1(129.286,88.773) 129.286,88.954 129.744,89.412 Q2.1
  Bottom Layer w0.254: v1(121.834,83.004) 127.603,88.773 v1(129.286,88.773)
NetQ3_1: Q3.1 U2.17 | length 9.8
  Top Layer w0.254: U2.17 125.152,67.552 125.644,68.044 Q3.1
NetQ4_1: Q4.1 U2.14 | length 14.6
  Top Layer w0.254: U2.14 117.034,66.052 119.013,64.072 125.628,64.072 128.105,61.595 Q4.1
NetR1_2: R1.2 U1.6 | length 4.8
  Top Layer w0.254: R1.2 114.24,83.046 114.894,83.7 116.508,83.7 116.738,83.47 U1.6 U1.6
NetR3_1: R3.1 U1.11 | length 2.1
  Top Layer w0.254: R3.1 119.507,80.958 119.761,81.212 U1.11
NetR5_2: R5.2 U1.20 | length 2.2
  Top Layer w0.254: U1.20 119.761,86.614 120.454,87.307 120.554,87.307 120.777,87.53 R5.2
NetR6_2: R6.2 U1.4 | length 4.8
  Top Layer w0.254: R6.2 115.127,86.233 115.286,86.392 116.144,86.392 116.649,85.887 116.649,85.173 116.649,84.821 117,84.47 U1.4 U1.4
NetR7_2: R7.2 U1.12 | length 2.7
  Top Layer w0.254: U1.12 120.653,81.969 120.65,81.966 120.65,80.899 121.031,80.518 R7.2
NetR12_1: R12.1 U1.13 | length 3.6
  Top Layer w0.254: U1.13 121.018,82.469 121.161,82.326 121.293,82.326 121.477,82.142 122.803,82.142 123.291,82.63 123.291,83.274 R12.1
NetR13_2: R13.2 U2.6 | length 10.1
  Top Layer w0.254: R13.2 111.787,62.46 110.286,63.961 109.128,63.961 108.486,64.602 108.486,65.354 109.085,65.953 109.819,65.953 110.418,66.552 110.672,66.552 111.022,66.902 111.736,66.902 112.086,66.552 U2.6
NetR14_1: R14.1 U2.11 | length 2.1
  Top Layer w0.254: U2.11 115.177,62.496 R14.1
NetR17_2: R17.2 U2.20 | length 2.7
  Top Layer w0.4: U2.20 115.177,69.167 116.114,70.104 R17.2
NetR18_2: R18.2 U2.4 | length 3.5
  Top Layer w0.254: R18.2 109.601,68.099 110.148,67.552 110.671,67.552 110.729,67.61 112.029,67.61 112.087,67.552 U2.4
NetR19_2: R19.2 U2.12 | length 2.7
  Top Layer w0.254: U2.12 116.112,63.354 116.74,62.726 R19.2
NetR23_1: R23.1 U2.13 | length 9
  Top Layer w0.254: U2.13 116.434,65.552 116.454,65.532 116.457,65.532 117.517,64.472 117.517,60.94 118.428,60.029 119.795,60.029 120.372,60.606 R23.1
VIN: C1.1 C4.2 C5.1 C14.1 L1.2 Q1.10 Q3.10 R4.2 R5.1 R16.2 R17.1 U1.1 U1.19 U2.1 U2.19 | length 141.3
  Top Layer w0.254: U2.19 C14.1@118.655,68.552 ; U1.19 120.696,86.049 121.954,87.307 122.054,87.307 122.277,87.53 R5.1
  Top Layer w0.5: C1.1 105.537,79.469 106.087,80.019 106.422,80.019 107.188,80.785 C5.1 107.196,81.801 107.427,81.801 109.739,84.112 109.739,84.721 112.051,87.033 117.212,87.033 U1.1@118.261,85.984 ; 111.817,78.519 113.677,76.659 113.677,70.612 ; U2.1 113.677,70.612 ; U1.1 U1.1@118.261,85.984 ; C14.1 118.747,68.459 118.655,68.552 118.364,68.843 118.364,69.52 118.848,70.004 R17.1 118.848,70.204 117.239,71.813 116.929,71.813 v1(116.782,71.96) 115.025,71.96 113.677,70.612 ; Q1.10 122.092,89.414 122.277,89.229 R5.1@122.277,87.73 ; R5.1 R5.1@122.277,87.73 ; U1.1@118.261,85.984 119.332,87.055 119.332,87.479 120.282,88.43 121.577,88.43 R5.1@122.277,87.73
  Top Layer w0.8: 123.122,57.912 123.122,57.074 v1(124.543,55.653) ; v1(124.079,69.85) 124.206,69.85 125.117,68.939 126.596,68.939 Q3.10 126.642,68.939 127.881,68.939 129.577,70.635 129.577,71.665 v1(129.667,71.755)
  Top Layer w1.2: 98.171,73.406 98.171,64.326 99.971,62.526 99.971,59.586 L1.2 100.121,58.162 100.371,57.912 123.122,57.912 123.825,58.615 123.825,59.666 R16.2
  Top Layer w1.3: C1.1 111.817,78.519 R4.2
  Bottom Layer w0.8: v1@116.782,72.009 116.83,71.96 121.969,71.96 v1(124.079,69.85) ; v1(124.543,55.653) 126.238,57.348 126.238,62.865 129.667,66.294 v1(129.667,71.755)
pads on no net: GND/3.3V.2 GND/3.3V.4 GND/3.3V.6 GND/3.3V.8 Q1.5-6-7 Q1.8 Q1.9 Q3.5-6-7 Q3.8 Q3.9 U1.2 U1.3 U1.21 U1.V1 U1.V2 U1.V3 U1.V4 U2.2 U2.3 U2.21 U2.V1 U2.V2 U2.V3 U2.V4
copper on no net: | length 15.2
  Top Layer w0.254: 84.709,100.334 cw(c86.846,100.334) 85.335,101.845 cw(c87.503,99.677) 87.503,102.743 ; 85.97,42.554 ccw(c88.138,44.722) 88.138,41.656 ; 178.562,41.656 ccw(c178.562,44.722) 180.73,42.554 ; 178.943,102.743 cw(c178.943,99.677) 181.111,101.845 ; 180.966,42.79 ccw(c178.798,44.958) 181.864,44.958 ; 181.325,101.631 cw(c180.024,100.33) 181.864,100.33

## Polygon pours and split planes (outlines as drawn)
GND on GND "GND_L02_P000" (solid, pour order 0): 84.709,101.092 84.963,101.346 84.963,101.473 85.217,101.727 85.217,101.854 85.344,101.854 85.852,102.362 85.979,102.362 86.106,102.489 86.233,102.489 86.36,102.616 86.614,102.616 86.741,102.743 179.705,102.743 179.832,102.616 180.086,102.616 180.213,102.489 180.34,102.489 180.467,102.362 180.594,102.362 181.356,101.6 181.483,101.6 181.483,101.473 181.737,101.219 181.737,101.092 181.864,100.965 181.864,44.196 181.737,44.069 181.737,43.815 181.61,43.688 181.61,43.561 181.483,43.434 181.483,43.307 181.102,42.926 181.102,42.799 180.975,42.799 180.34,42.164 180.213,42.164 179.959,41.91 179.832,41.91 179.705,41.783 179.451,41.783 179.324,41.656 87.376,41.656 87.249,41.783 86.995,41.783 86.868,41.91 86.741,41.91 86.614,42.037 86.487,42.037 85.09,43.434 85.09,43.561 84.963,43.688 84.963,43.815 84.836,43.942 84.836,44.069 84.709,44.196
GND on Bottom Layer "GND_L04_P001" (solid, pour order 1): 84.709,101.092 84.963,101.346 84.963,101.473 85.852,102.362 85.979,102.362 86.106,102.489 86.233,102.489 86.36,102.616 86.614,102.616 86.741,102.743 179.705,102.743 179.832,102.616 180.213,102.616 180.467,102.362 180.594,102.362 181.737,101.219 181.737,101.092 181.864,100.965 181.864,44.196 181.737,44.069 181.737,43.815 181.61,43.688 181.61,43.561 181.483,43.434 181.483,43.307 180.213,42.037 180.086,42.037 179.959,41.91 179.832,41.91 179.705,41.783 179.451,41.783 179.324,41.656 87.376,41.656 87.249,41.783 86.995,41.783 86.868,41.91 86.741,41.91 86.614,42.037 86.487,42.037 86.106,42.418 85.979,42.418 85.979,42.545 85.09,43.434 85.09,43.561 84.963,43.688 84.963,43.815 84.836,43.942 84.836,44.196 84.709,44.323 84.709,44.958
GND on Top Layer "GND_L01_P002" (solid, pour order 2): 84.582,102.743 84.709,102.616 84.709,41.656 181.483,41.656 181.991,42.164 181.864,42.291 181.864,102.743

## Silkscreen, mask and mechanical layers (free items; w line width, h text height)
Top Overlay:
  drawing of 29 lines, arcs and shapes, not listed
  text "Step-down converter  made by Joseph" at 113.411,43.942 h1.52